# Altium PCB broken_sodimm_stackup.PcbDoc (part 7 of 7)
Units mm, origin at the board's own origin, x right, y up, seen from the top; angles counter-clockwise.
Board outline 69.63 x 30.03 mm, 8 copper layers (TOP, SIGA__, L3, PWR4, L5, L6, SIGB__, BOTTOM), stack 1.2 mm thick; 199 components, 229 nets, 1321 pads, 785 vias.
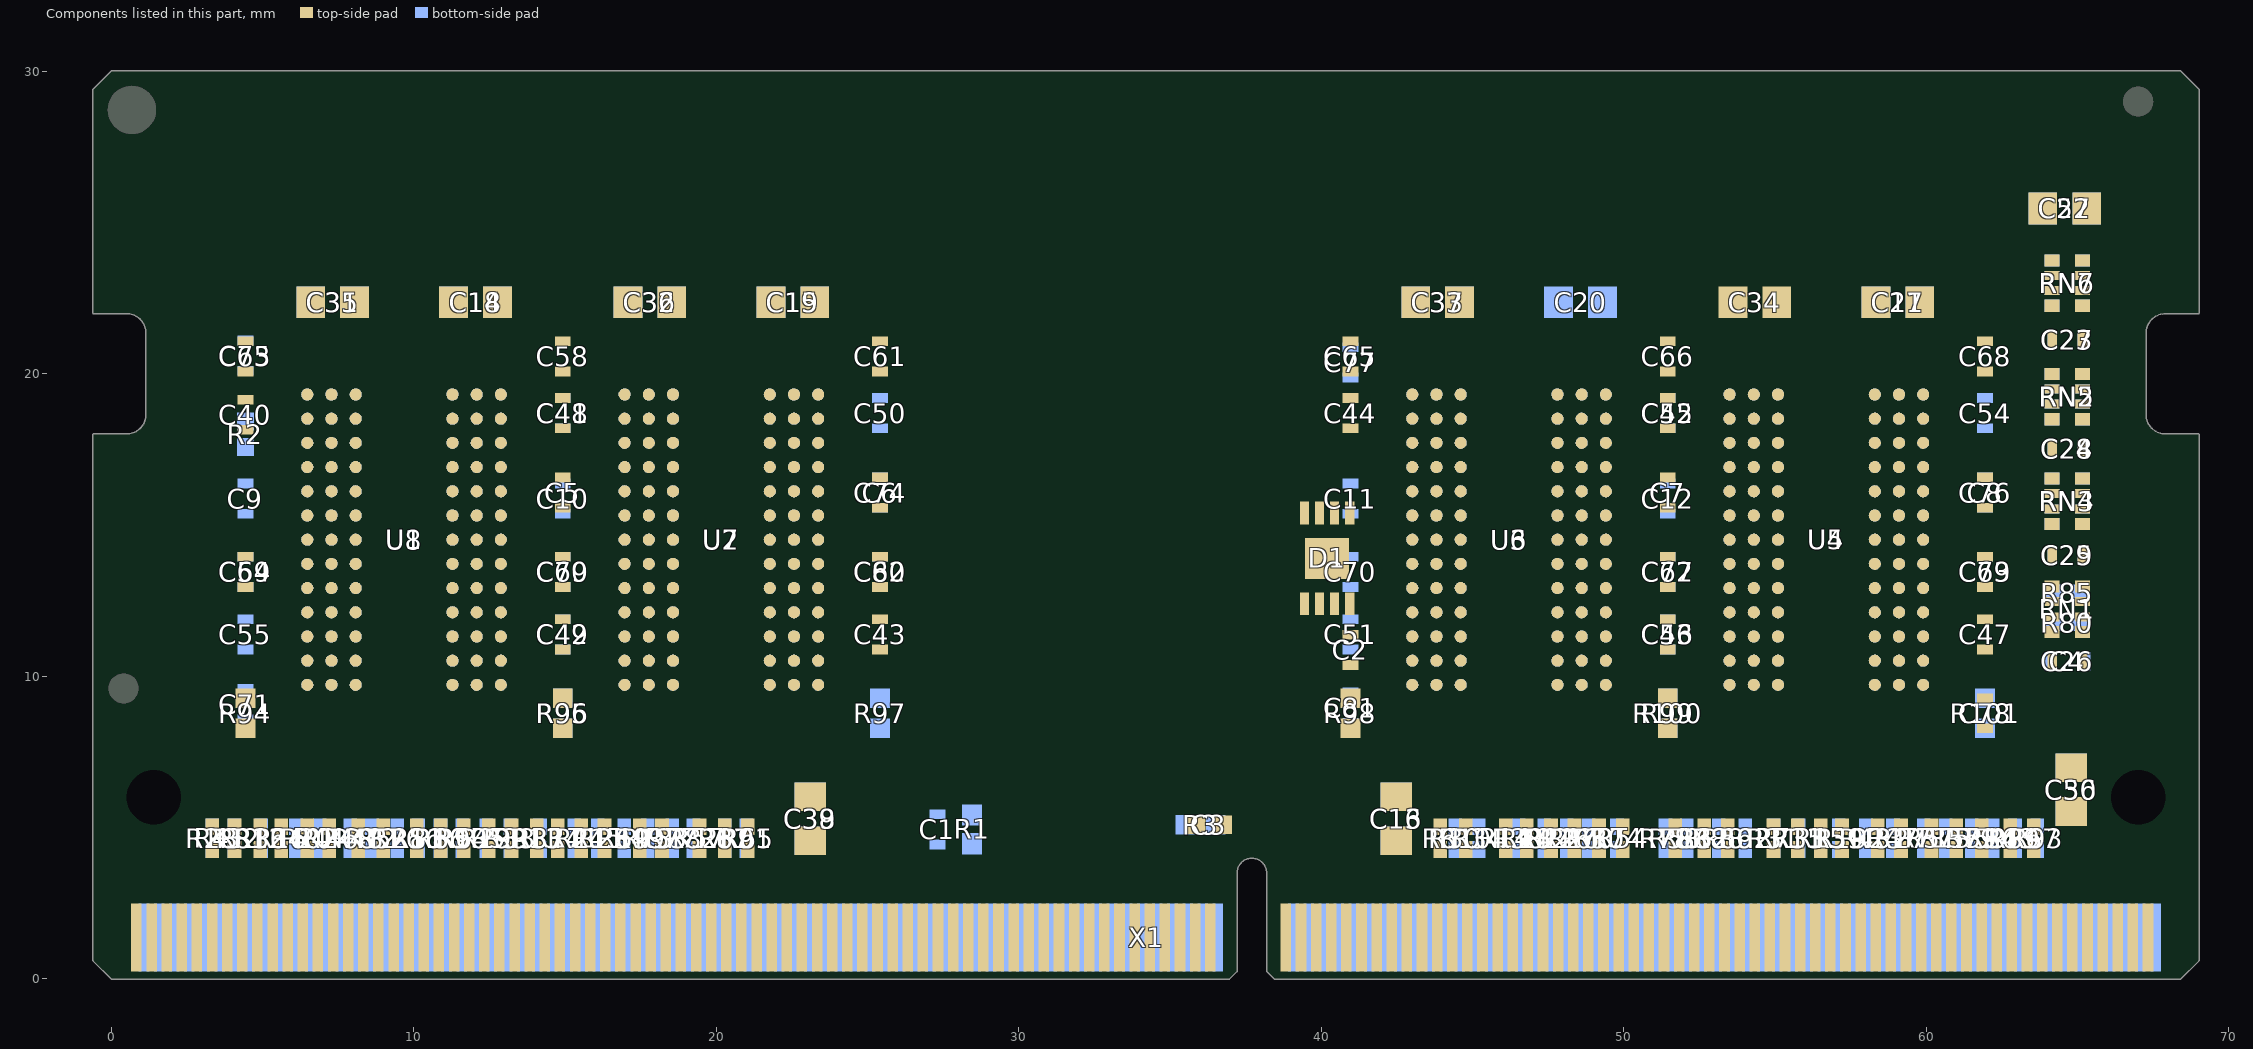
[diagram p12: the components of this part, seen from the top]

## Polygon pours and split planes (outlines as drawn) (continued)
VTT on BOTTOM "BOTTOM-VTT" (solid, pour order 0): 471 vertices, not listed, extent 63.838,3.378 67.85,24.822
VPP on BOTTOM "BOTTOM-VPP" (solid, pour order 6): 197 vertices, not listed, extent 64.416,2.933 66.585,5.034
VDD on PWR4 "VDD4-VDD" (solid, pour order 20): 70 vertices, not listed, extent -0.349,0.3 68.75,29.749
VTT on PWR4 "VDD4-VTT" (solid, pour order 76): 22 vertices, not listed, extent 64.252,2.569 68.75,24.97
GND on TOP "Route Guide-No Net" (solid, remove dead copper, pour order 72): 209 vertices, not listed, extent -0.35,2.443 68.75,29.75
VPP on TOP "TOP-VPP" (solid, pour order 14): 420 vertices, not listed, extent 60.063,2.7 67.408,11.198
GND on TOP "TOP-GND" (solid, remove dead copper, pour order 50): 799 vertices, not listed, extent 58.865,11.189 62.69,15.558
VTT on TOP "TOP-VTT" (solid, pour order 4): 91 vertices, not listed, extent 64.878,8.063 68.75,26.095
GND on L5 "S5-GND 2" (solid, pour order 84): 172 vertices, not listed, extent 11.893,0.3 68.35,14.046
VPP on L5 "S5-VPP" (solid, pour order 8): 74 vertices, not listed, extent 5.046,2.44 68.35,23.68
GND on L5 "S5-GND" (solid, pour order 22): 18 vertices, not listed, extent -0.35,22.25 68.75,29.75
GND on L5 "S5-GND 1" (solid, pour order 24): 31.944,3.177 32.161,2.96 36.859,2.96 36.95,2.849 36.95,0.354 36.896,0.3 0.054,0.3 0.05,4.433 3.26,4.433 4.516,3.177
GND on L3 "S3-GND" (solid, pour order 36): 182 vertices, not listed, extent -0.35,0.3 68.35,29.75
VPP on L3 "S3-VPP" (solid, pour order 10): 158 vertices, not listed, extent 2.656,4.03 67.154,15.178
GND on L6 "S6-GND" (solid, pour order 56): 29 vertices, not listed, extent -0.35,0.3 68.75,29.75
VPP on L6 "S6-VPP" (solid, pour order 12): 71 vertices, not listed, extent 3.13,2.868 66.699,11.304
GND on L6 "S6-GND 4" (solid, pour order 46): 55 vertices, not listed, extent 50.403,5.825 55.727,13.629
GND on L6 "S6-GND 2" (solid, pour order 42): 26 vertices, not listed, extent 12.284,10.882 17.244,13.578
GND on SIGB__ "SPLIT7-GND 1" (solid, pour order 34): 25 vertices, not listed, extent 0.05,0.3 27.462,13.483
VDD on SIGB__ "SPLIT7-VDD" (solid, pour order 16): 183 vertices, not listed, extent -0.35,0.3 68.75,29.75
GND on SIGB__ "SPLIT7-GND" (solid, pour order 32): 49 vertices, not listed, extent 40.009,0.3 68.35,13.443
GND on SIGA__ "SPLIT2-GND 1" (solid, pour order 30): 27.374,6.48 27.016,6.122 27.374,5.764 27.374,2.55 0.825,2.55 0.825,0.3 0.055,0.3 0.05,9.72 3.766,13.436 26.407,13.436 27.374,12.469
VDD on SIGA__ "SPLIT2-VDD" (solid, pour order 18): 207 vertices, not listed, extent -0.35,0.3 68.75,29.75
GND on SIGA__ "SPLIT2-GND" (solid, pour order 28): 859 vertices, not listed, extent 40.064,0.3 68.35,13.354

## Keep-outs
Keep-Out Layer:
  lines w0.025: -0.6,0.6 0,0 ; -0.6,0.6 -0.6,18 ; -0.6,0.6 0,0 ; -0.6,0.6 -0.6,18 ; -0.6,18 0.5,18 ; -0.6,18 0.5,18 ; -0.6,22 0.5,22 ; -0.6,22 -0.6,29.4 ; -0.6,22 0.5,22 ; -0.6,22 -0.6,29.4 ; -0.6,29.4 0,30 ; -0.6,29.4 0,30 ; 0,0 36.95,0 ; 0,0 36.95,0 ; 0,30 68.4,30 ; 0,30 68.4,30 ; 0.5,18 ccw(c0.5,18.65) 1.15,18.65 ; 0.5,18 ccw(c0.5,18.65) 1.15,18.65 ; 0.5,22 cw(c0.5,21.35) 1.15,21.35 ; 0.5,22 cw(c0.5,21.35) 1.15,21.35 ; 1.15,18.65 1.15,21.35 ; 1.15,18.65 1.15,21.35 ; 36.95,0 37.2,0.25 ; 36.95,0 37.2,0.25 ; 37.2,0.25 37.2,3.5 ; 37.2,0.25 37.2,3.5 ; 37.2,3.5 cw(c37.7,3.5) 38.2,3.5 ; 37.2,3.5 cw(c37.7,3.5) 38.2,3.5 ; 38.2,0.25 38.45,0 ; 38.2,0.25 38.2,3.5 ; 38.2,0.25 38.45,0 ; 38.2,0.25 38.2,3.5 ; 38.45,0 68.4,0 ; 38.45,0 68.4,0 ; 67.25,18.65 ccw(c67.9,18.65) 67.9,18 ; 67.25,18.65 ccw(c67.9,18.65) 67.9,18 ; 67.25,18.65 67.25,21.35 ; 67.25,18.65 67.25,21.35 ; 67.25,21.35 cw(c67.9,21.35) 67.9,22 ; 67.25,21.35 cw(c67.9,21.35) 67.9,22 ; 67.9,18 69,18 ; 67.9,18 69,18 ; 67.9,22 69,22 ; 67.9,22 69,22 ; 68.4,0 69,0.6 ; 68.4,0 69,0.6 ; 68.4,30 69,29.4 ; 68.4,30 69,29.4 ; 69,0.6 69,18 ; 69,0.6 69,18 ; 69,22 69,29.4 ; 69,22 69,29.4

## Other copper
TOP:
  pour cut-out: 27.584,26.755 27.584,26.672 28.274,26.672 28.274,26.755
  pour cut-out: 28.911,26.769 28.911,26.686 29.601,26.686 29.601,26.769
  pour cut-out: 31.163,27.117 31.163,27.034 31.853,27.034 31.853,27.117
  text "1" at 0.614,3.737 h0.64
L6:
  pour cut-out: 9,20.444 9.444,20 41,20 41,25 39.095,26.905 13.691,26.905 8.877,22.091 8.877,20.444

## Silkscreen, mask and mechanical layers (free items; w line width, h text height)
Top Overlay:
  lines w0.15: 14.006,20.721 14.07,20.657 14.07,19.616 14.239,19.447 14.253,19.447 ; 50.71,20.541 50.71,18.938 50.939,18.709
Top Solder:
  lines w0.3: 37.2,0.25 37.2,3.5 ; 37.2,0.25 36.95,0 37.2,0.25 ; 37.2,0.25 37.2,3.5 ; 37.2,3.5 cw(c37.7,3.5) 38.2,3.5 ; 37.2,3.5 cw(c37.7,3.5) 38.2,3.5 ; 38.2,0.25 38.45,0 38.2,0.25 ; 38.2,0.25 38.2,3.5 ; 38.2,0.25 38.2,3.5
Notes:
  text "Press F5 to enable/disable net color highlighting" at -19.438,-10.988 h5
Board Shape:
  the board outline again, w0.2